# Altium PCB TopOverLayer.PcbDoc
Units mil, origin at the board's own origin, x right, y up, seen from the top; angles counter-clockwise.
Board outline 3800 x 2345 mil, 2 copper layers (Top Layer, Bottom Layer); 4 components, 0 nets, 4 pads, 44 vias.
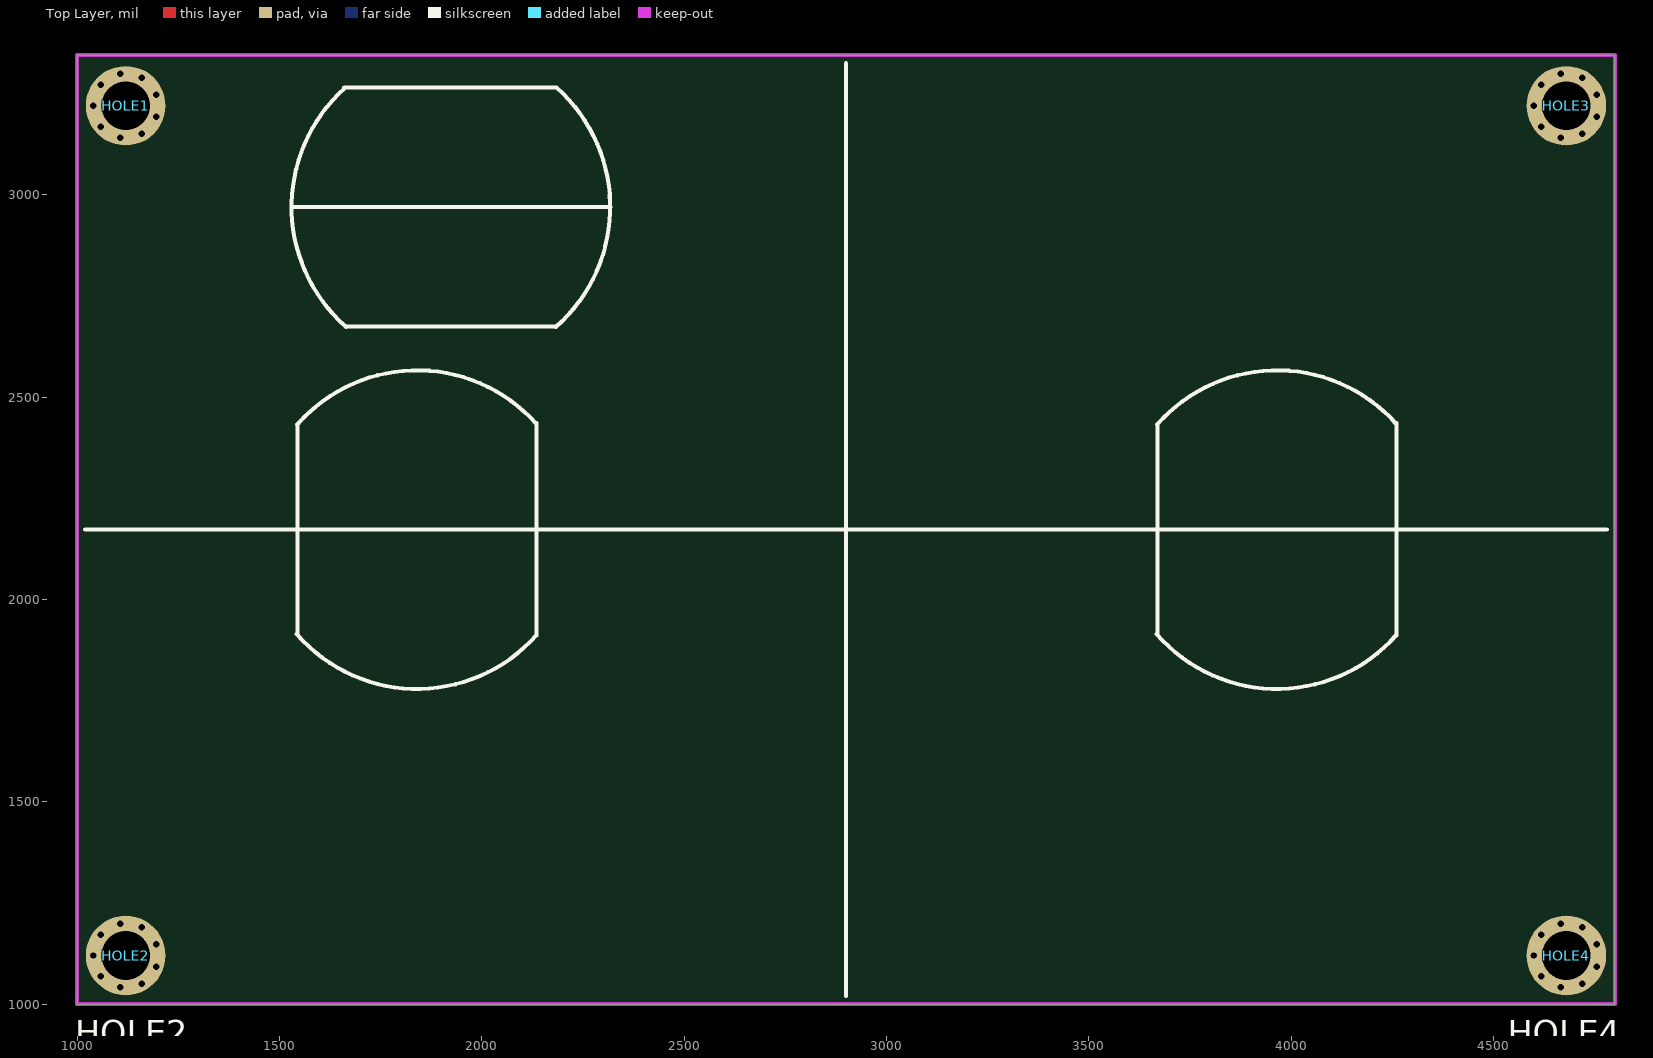
[diagram p0: Top Layer view]
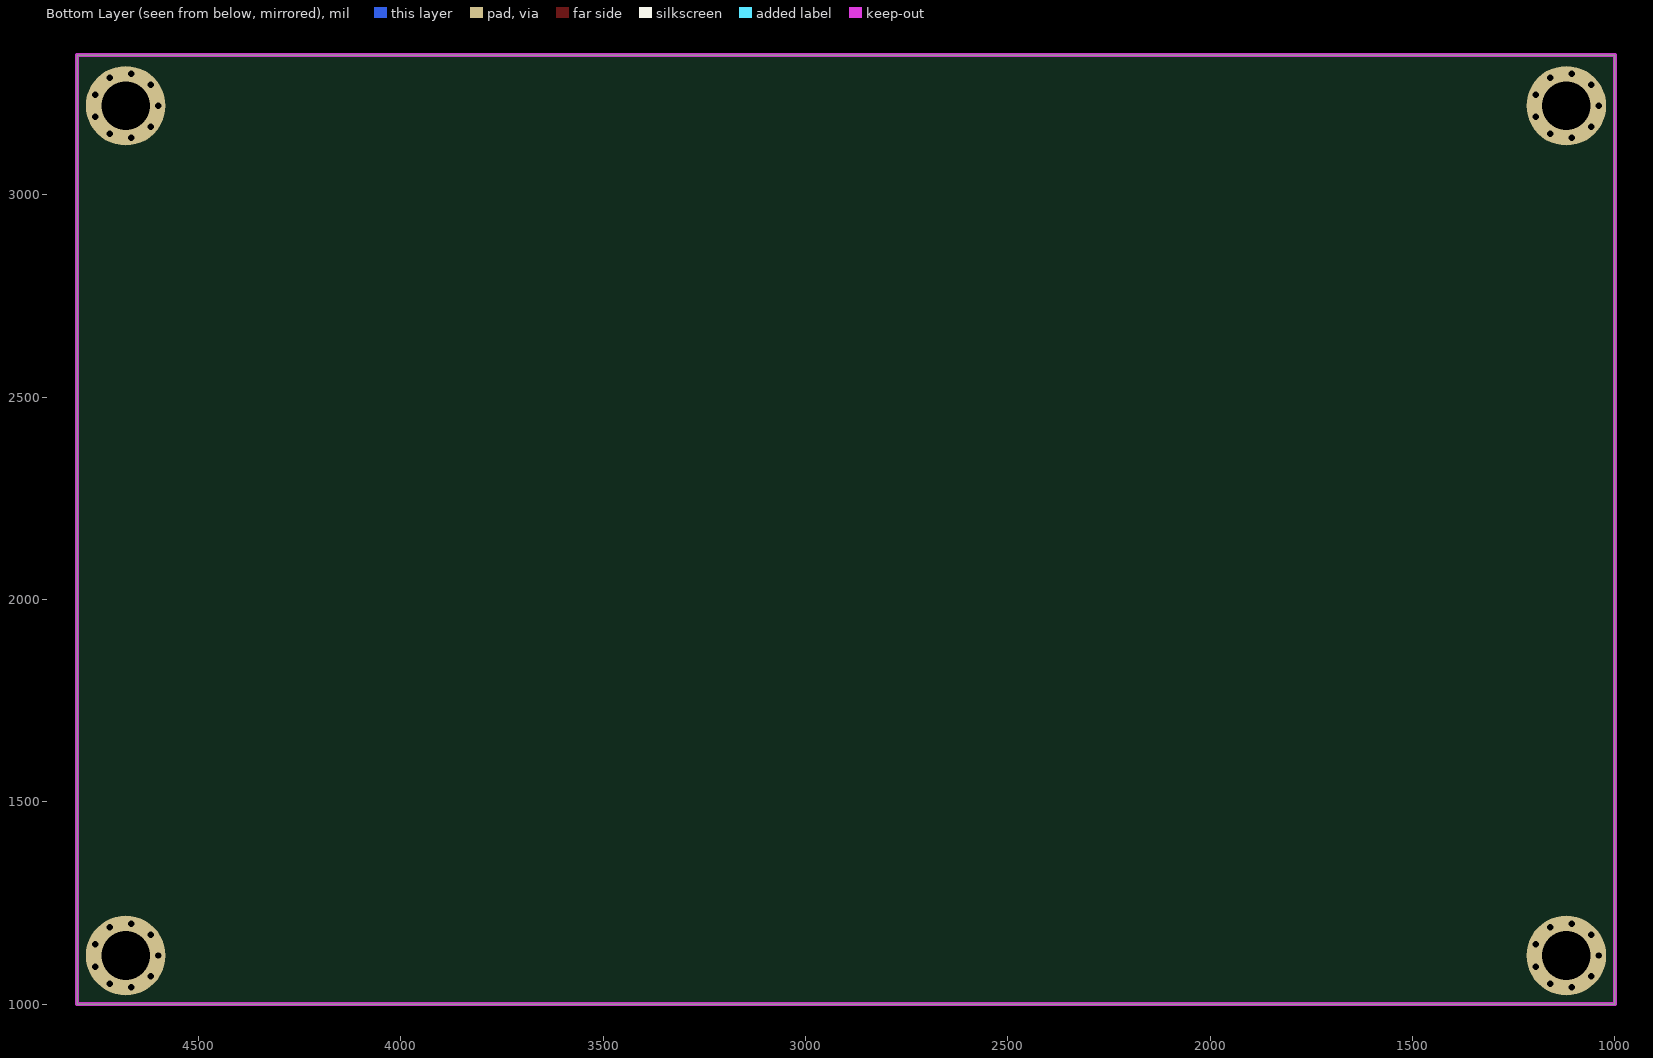
[diagram p1: Bottom Layer view, seen from below]

## Layer stack, top to bottom
Top Layer: signal copper 1.4
Dielectric: dielectric 12.6, FR-4, Dk 4.8
Bottom Layer: signal copper 1.4

## Board outline
1000,1000 4800,1000 4800,3345 1000,3345

## Design rules (kind name [scope] priority, off if disabled: settings)
Clearance [All] p1: gap=10
PolygonConnect [All] p1: connectstyle=Relief reliefconductorwidth=10 reliefentries=4 polygonreliefangle="90 Angle"
RoutingVias [All] p1: holewidth=28 width=50 viastyle="Through Hole" minholewidth=28 minwidth=50 maxholewidth=28 maxwidth=50
SilkscreenOverComponentPads [All] p1: minsilkscreentomaskgap=10
SolderMaskExpansion [All] p1: expansion=4
TestPointUsage [All] p1: valid=0 allowmultiple=FALSE
Testpoint [All] p1: side=15 testpointundercomponent=TRUE minsize=40 maxsize=100 preferedsize=60 minholesize=0 maxholesize=40 preferedholesize=32 testpointgrid=1 style=1023 order=0123456789
Width [All] p1: maxlimit=10 minlimit=10 preferedwidth=10
23 further rules are at their usual default settings.

## Components (designator, comment, footprint, x,y, rotation, side; value= is the part's Value field where it differs from the comment)
HOLE1 "HOLE" HOLE-M3 1120,3220 r0 top
HOLE2 "HOLE" HOLE-M3 1120,1120 r0 top
HOLE3 "HOLE" HOLE-M3 4680,3220 r0 top
HOLE4 "HOLE" HOLE-M3 4680,1120 r0 top

## Footprints (in the part's own frame and the unit in brackets; to place one, negate y for a bottom-side part, rotate by r counter-clockwise, add the part's x,y. Pads: shape width x height; smd on the part's side, far side on the other; paste and mask are expansions set on the pad)
HOLE-M3 [mm]
  round 5 hole 3.05: 1(0,0)

## Via types
v1: diameter 28, hole 16, Top Layer to Bottom Layer, 44 vias

## Nets (pads, with @x,y where several pads share a name; then routed paths per layer and width w, separated by ;. In a path a pad name is that pad's centre, name@x,y a point inside that pad or via, vN(x,y) a via of type N, cw(c..) or ccw(c..) an arc to the next point about the centre after c; other vN are vias at no path point)
pads on no net: HOLE1.1 HOLE2.1 HOLE3.1 HOLE4.1
copper on no net:
  other v1: 1106.11,1041.22 4666.11,1041.22 1160,1050.72 4720,1050.72 1058.72,1068.58 4618.72,1068.58 1195.18,1092.64 4755.18,1092.64 1040,1120 1040,1120 1040,1120 4600,1120 4600,1120 4600,1120 1195.18,1147.36 4755.18,1147.36 1058.72,1171.42 4618.72,1171.42 1160,1189.28 4720,1189.28 1106.11,1198.78 4666.11,1198.78 1106.11,3141.22 4666.11,3141.22 1160,3150.72 4720,3150.72 1058.72,3168.58 4618.72,3168.58 1195.18,3192.64 4755.18,3192.64 1040,3220 1040,3220 1040,3220 4600,3220 4600,3220 4600,3220 1195.18,3247.36 4755.18,3247.36 1058.72,3271.42 4618.72,3271.42 1160,3289.28 4720,3289.28 1106.11,3298.78 4666.11,3298.78

## Keep-outs
Keep-Out Layer:
  the board outline again, w10

## Silkscreen, mask and mechanical layers (free items; w line width, h text height)
Top Overlay:
  lines w10: 1020,2172.53 4780,2172.53 ; 1530,2970 2317.4,2970 ; 1542.68,1914.45 ccw(c1840,2172.53) 2134.83,1911.62 ; 1543.88,2431.97 cw(c1840,2172.53) 2133.65,2434.77 ; 1544.72,1916.23 1544.72,2431.23 ; 1660,3265.28 2185,3265.28 ; 1661.46,3263.65 ccw(c1923.7,2970) 1664.26,2673.88 ; 1665,2674.72 2180,2674.72 ; 2135.28,1911.23 2135.28,2436.23 ; 2181.77,2672.68 ccw(c1923.7,2970) 2184.61,3264.83 ; 2900,1020 2900,3325 ; 3667.68,1914.45 ccw(c3965,2172.53) 4259.83,1911.62 ; 3668.88,2431.97 cw(c3965,2172.53) 4258.65,2434.77 ; 3669.72,1916.23 3669.72,2431.23 ; 4260.28,1911.23 4260.28,2436.23

## Dimensions
2900,1020 to 3669.72,1916.23 on Top Overlay
2135.28,1911.23 to 2900,1020 on Top Overlay
1544.72,1916.23 to 4260.28,1911.23 on Top Overlay
1660,3265.28 to 1530,2970 on Top Overlay
1000,3345 to 4800,3345 on Top Overlay
1000,1000 to 1000,3345 on Top Overlay